# Altium PCB USB_soundcard PCB.pcbdoc (part 1 of 2)
Units mil, origin at the board's own origin, x right, y up, seen from the top; angles counter-clockwise.
Board outline 41897 x 30671 mil, 2 copper layers (Top Layer, Bottom Layer); 93 components, 106 nets, 313 pads, 255 vias.
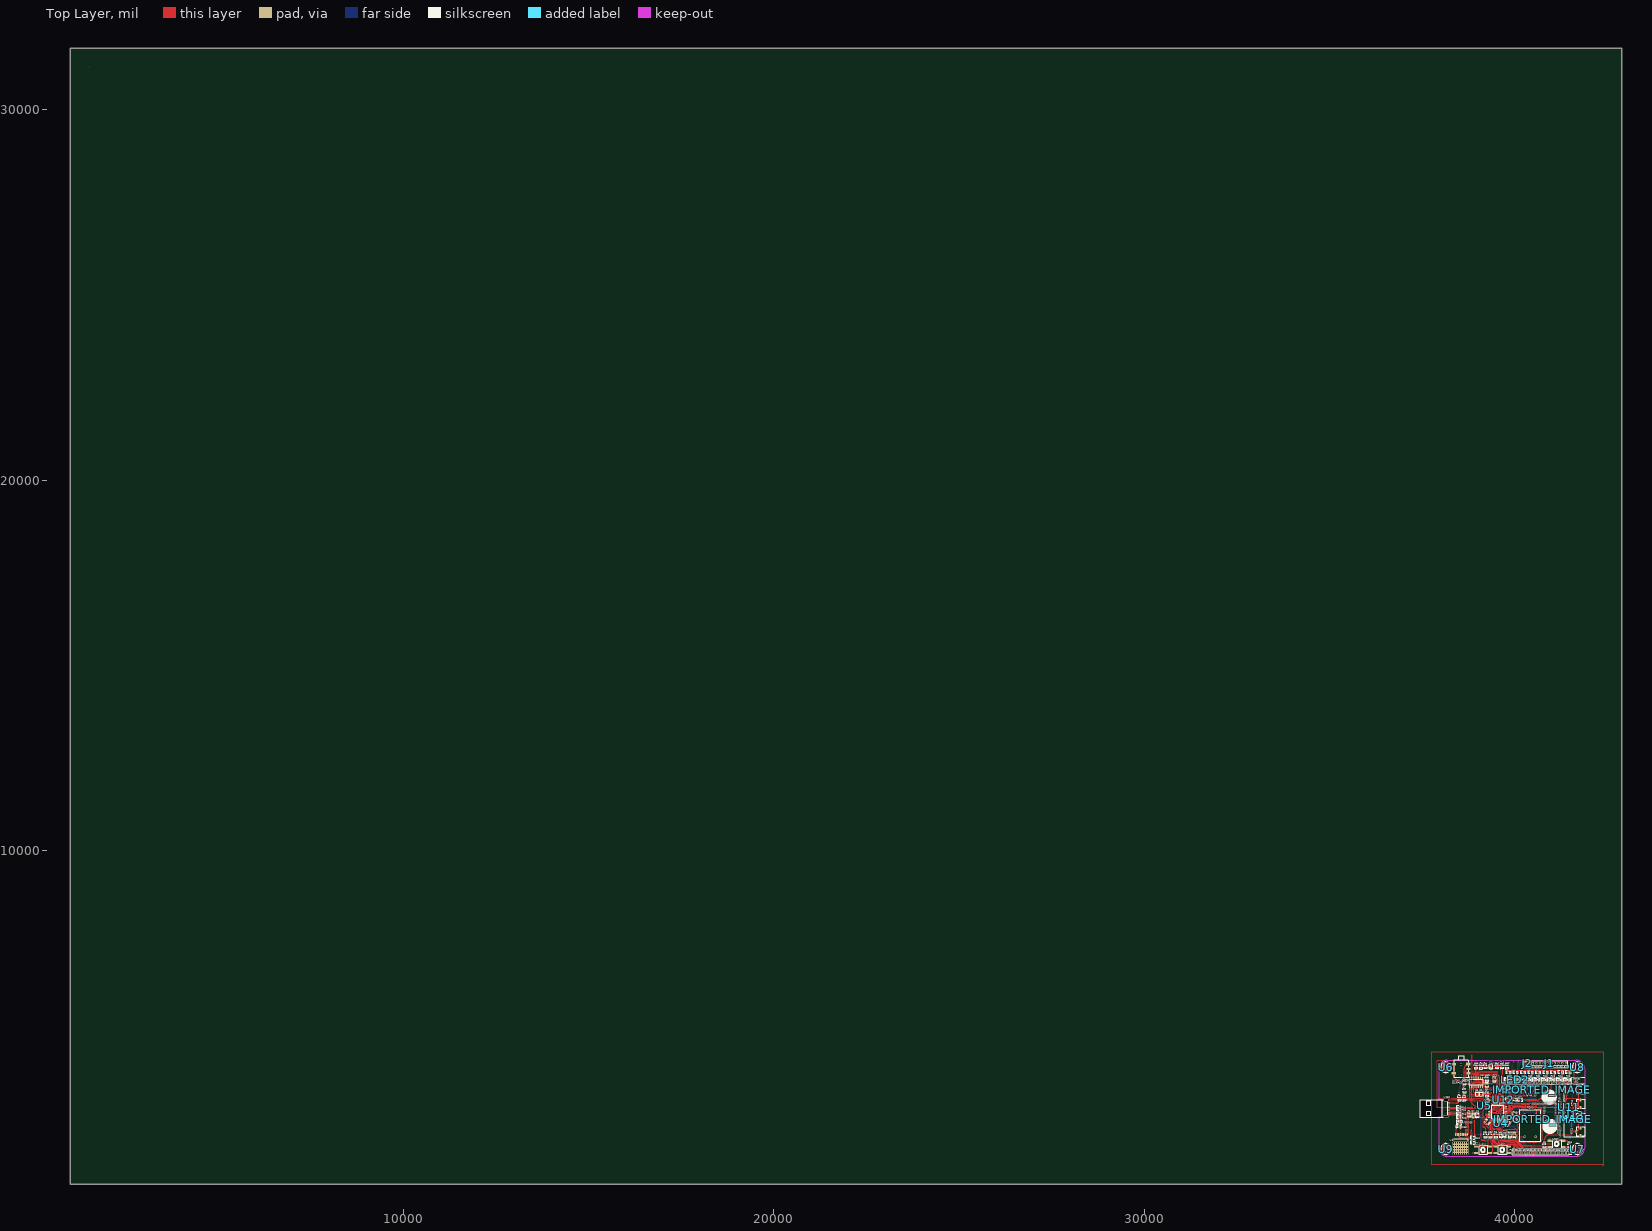
[diagram p0: Top Layer view]
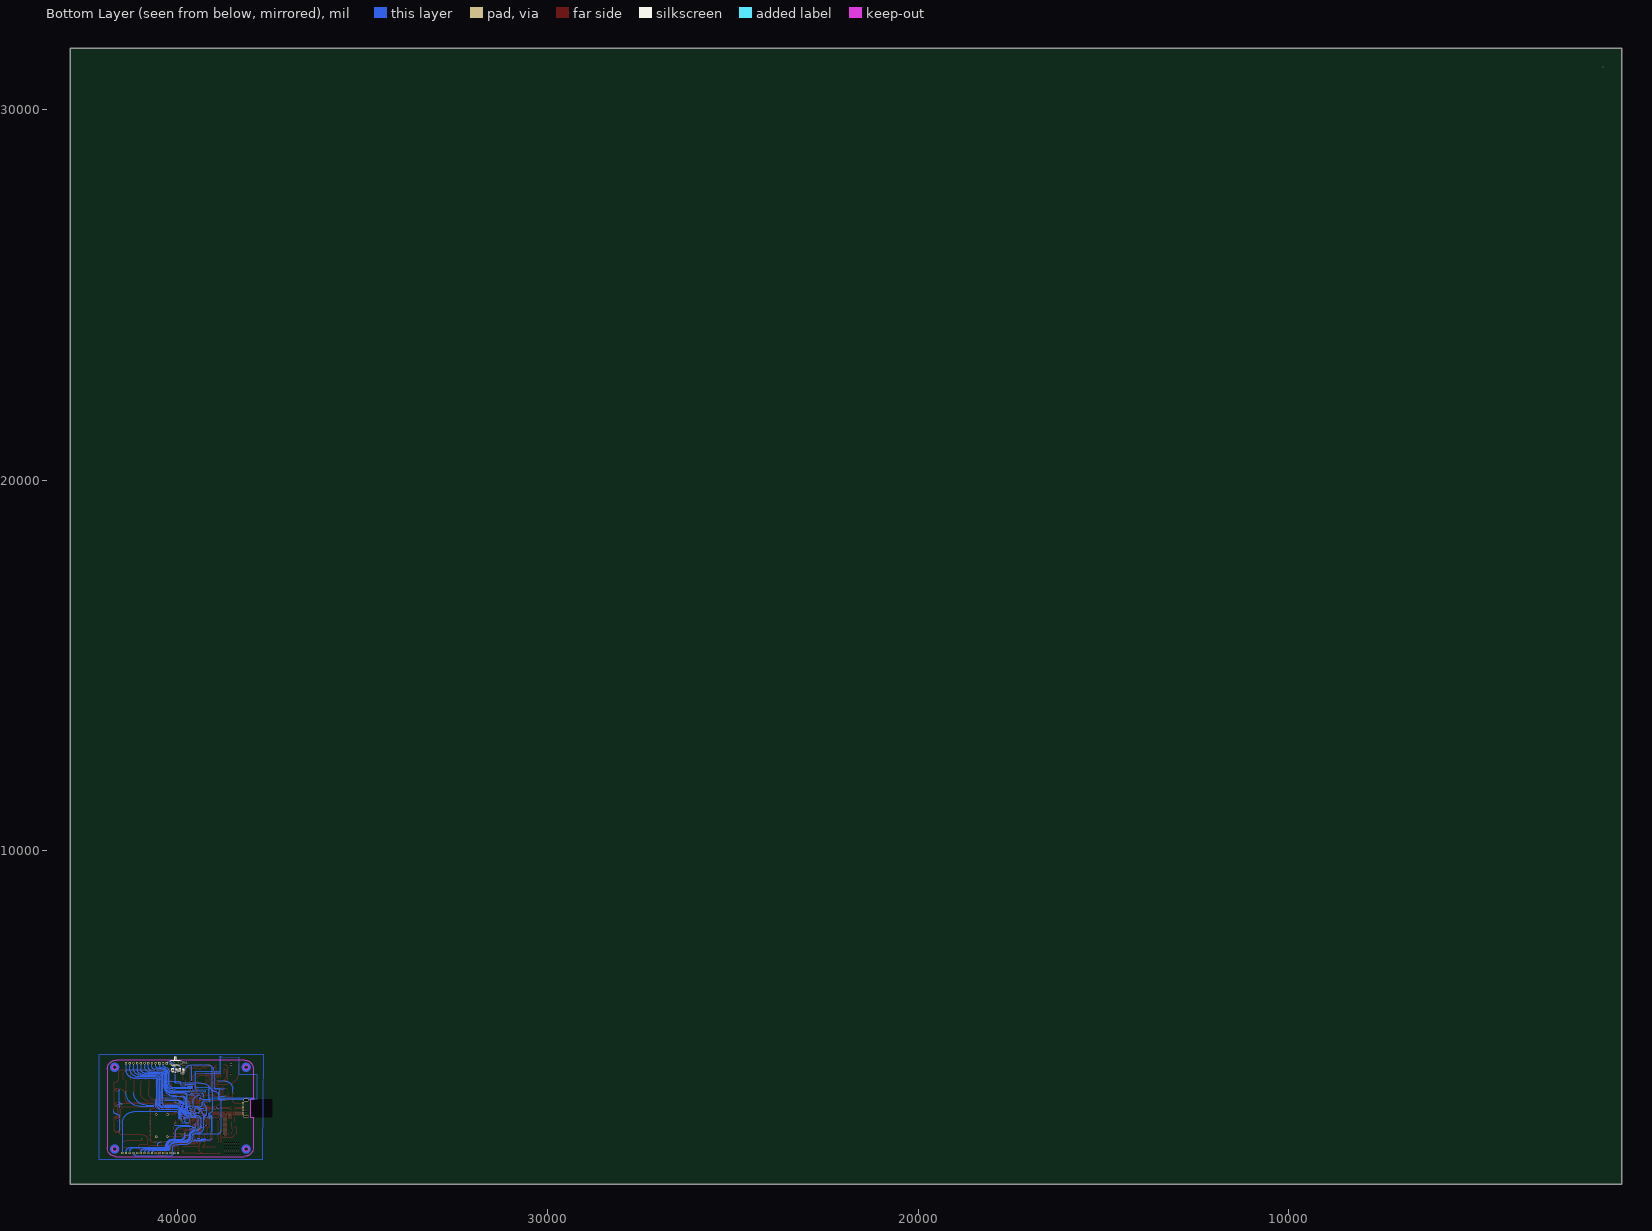
[diagram p1: Bottom Layer view, seen from below]

## Layer stack, top to bottom
Top Layer: signal copper (thickness not stored)
Dielectric: dielectric 12.6, FR-4, Dk 4.8
Bottom Layer: signal copper (thickness not stored)

## Board outline
42897,1000 1000,1000 1000,31671 42897,31671

## Components (designator, comment, footprint, x,y, rotation, side; value= is the part's Value field where it differs from the comment)
AUDIO_OUTPUT "PJ-365-A" AUDIO-SMD_PJ-365-A 38552.91,4116.03 r0 top
C1 "2.2uF" C0805 39247,3426.05 r90 top
C2 "100nF" C0805 38639.93,3312 r270 top
C3 "10uF" CAP-SMD_L3.2-W1.6 38981.93,3435 r270 top
C4 "4.7nF" C0805 39245.93,3672 r270 top
C6 "10uF" CAP-SMD_L3.2-W1.6 39092.93,3435 r270 top
C7 "10uF" CAP-SMD_L3.2-W1.6 38881,2862.05 r270 top
C8 "4.7nF" C0805 38639.93,3741 r270 top
C9 "2.2uF" C0805 38995,2865.05 r270 top
C10 "1uF" C0805 39245.93,3840 r270 top
C11 "100nF" C0805 38867.93,2112 r0 top
C12 "1uF" C0805 39452.93,3837 r90 top
C14 "10uF" CAP-SMD_L3.2-W1.6 39362.93,4173 r90 top
C15 "4.7uF" C0805 38954.93,4176 r270 top
C16 "100nF" C0805 41476,2037.05 r270 top
C17 "100nF" C0805 39512.93,4179 r270 top
C18 "100nF" C0805 39656.93,4179 r270 top
C19 "100nF" C0805 39788.93,4176 r270 top
C22 "10uF" CAP-SMD_L3.2-W1.6 39733,2319.05 r90 top
C23 "100nF" C0805 40156,3282.05 r180 top
C24 "1uF" C0805 39988,2322.05 r270 top
C25 "1nF" C0805 39871,2322.05 r90 top
C26 "100nF" C0805 39802,3276.05 r135 top
C27 "100nF" C0805 39259,3231.05 r45 top
C28 "100nF" C0805 39262,2676.05 r135 top
C29 "100nF" C0805 39814,2640.05 r225 top
C30 "10pF" C0805 39997.99,2731 r0 top
C31 "100nF" C0805 39208,2319.05 r90 top
C32 "100nF" C0805 39346,2319.05 r90 top
C33 "10nF" C0805 38497,2562.05 r180 top
C34 "2.2uF" C0805 38867.93,2256 r0 top
FPC1 "XW05200-04" FPC-SMD_4P-P0.50_XW05200-04 41722,3552 r90 top
FPC2 "XW05200-04" FPC-SMD_4P-P0.50_XW05200-04 41722,3168 r90 top
FPC3 "XW05200-04" FPC-SMD_4P-P0.50_XW05200-04 41722,2787 r90 top
FPC4 "XW05200-04" FPC-SMD_4P-P0.50_XW05200-04 41722,2418 r90 top
IMPORTED_IMAGE "IMPORTED_IMAGE" IMPORTED_IMAGE 40755.25,2758.62 r0 top
IMPORTED_IMAGE "IMPORTED_IMAGE" IMPORTED_IMAGE 40730.26,3544.87 r0 top
J1 "HDR-M-2.54_1x10" HDR-M-2.54_1X10 40936,4266 r0 top
J2 "HDR-M-2.54_1x2" HDR-M-2.54_1X2 40336,4266 r0 top
KEY1 "TS-1102S-C-E-B" KEY-SMD_4P-L6.0-W6.0-P4.50-LS8.6 39143.9,1926 r0 top
KEY2 "TS-1102S-C-E-B" KEY-SMD_4P-L6.0-W6.0-P4.50-LS8.6 39662.9,1926 r0 top
L1 "FCM1608KF-601T03" L0603 40000,3282.05 r0 top
L2 "FCM1608KF-601T03" L0603 39613,2316.05 r270 top
LED1 "Red" LED0805-R-RD 39814,3816.05 r0 top
LED2 "Red" LED0805-R-RD 40012,3816.05 r0 top
LED3 "Red" LED0805-R-RD 40210,3816.05 r0 top
LED4 "Green" LED0805-FD 40414,3816.05 r180 top
LED5 "Green" LED0805-FD 40615,3816.05 r180 top
LED6 "Green" LED0805-FD 40819,3816.05 r180 top
LED7 "Blue" LED0805-R-RD 41023.05,3816.05 r0 top
LED8 "Blue" LED0805-R-RD 41227,3816.05 r0 top
LED9 "Blue" LED0805-R-RD 41431,3813.05 r0 top
NRST "TS-1102S-C-E-B" KEY-SMD_4P-L6.0-W6.0-P4.50-LS8.6 41132.9,2085 r0 top
P1 "Header-Female-2.54_1x16" HDR-16X1/2.54 40733.93,1839 r270 top
POWER "Green" LED0805-FD 38500,2688.05 r0 top
R1 "0" R0805#1 38764,2868.05 r270 top
R2 "130K" R0805#1 38639.93,3522 r90 top
R3 "100K" R0805#1 39487,2319.05 r90 top
R4 "0" R0805#1 39206.93,4179 r270 top
R5 "0" R0805#1 38504.93,3312 r270 top
R6 "100K" R0805#1 39083.93,4176 r90 top
R7 "10K" R0805#1 40798,2037.05 r270 top
R10 "10K" R0805#2 39882.63,4077 r180 bottom
R11 "10K" R0805#2 40075.37,4077 r180 bottom
R12 "10" R0805#1 39997.99,2881 r180 top
R14 "0" R0603 38500,2910.05 r180 top
R15 "0" R0603 38498.93,3015 r180 top
R16 "0" R0603 38498.93,3081 r180 top
R17 "620" R0805#1 39824.93,4014 r0 top
R18 "620" R0805#1 40019.93,4014 r0 top
R19 "620" R0805#1 40220.93,4014 r0 top
R20 "620" R0805#1 40423,4014.05 r0 top
R21 "620" R0805#1 40624,4014.05 r0 top
R22 "620" R0805#1 40828,4014.05 r0 top
R23 "330" R0805#1 41032,4014.05 r0 top
R24 "330" R0805#1 41236,4017.05 r0 top
R25 "330" R0805#1 41440,4017.05 r0 top
R26 "1K" R0805#1 38497,2805.05 r0 top
SW1 "K3-1296S-J1" SW-SMD_K3-1296S-J1 40042,4287 r0 bottom
TCXO "有源温补晶振24.576MHz" TCXO 40568,2281 r90 top
U1 "STM32F446RET6" LQFP-64_L10.0-W10.0-P0.50-LS12.0-BL 39536.93,2949 r90 top
U2 "TPS78633KTTR" TO-263-5_L10.2-W9.9-P1.70-LS14.4-TL 38537.93,2157 r270 top
U3 "ES9023" SOP-16_150MIL 38783.93,3660 r90 top
U4 "test" TEST 39625,2646 r0 top
U5 "test" TEST 39175,3120 r0 top
U6 "M3" M3-3 38141.93,4155 r0 top
U7 "M3" M3-3 41691.93,1947 r0 top
U8 "M3" M3-3 41691.93,4155 r0 top
U9 "M3" M3-3 38141.93,1947 r0 top
U11 "test" TEST 41464,3075 r0 top
U12 "test" TEST 39685,3273 r0 top
U13 "test" TEST 41581,2862 r0 top
USB1 "USB-05" USB-A-TH_48037-0001 38186.15,3048 r270 top

## Footprints (in the part's own frame and the unit in brackets; to place one, negate y for a bottom-side part, rotate by r counter-clockwise, add the part's x,y. Pads: shape width x height; smd on the part's side, far side on the other; paste and mask are expansions set on the pad)
AUDIO-SMD_PJ-365-A [mm]
  rect 3x2 smd: 1(5,3.1) 2(-5,-3.1)
  rect 3x1.5 smd: 3(5.08,-3.1) 4(-5.08,3.1) 5(5.08,-0.1)
  round 1.6 hole 1.6 unplated: ""(0,-3.1) ""(0,2.9)
  silkscreen extent -4.95,-6.15 4.95,8.9
C0805 [mm]
  rect 1x1.55 smd: 1(-1,0) 2(1,0)
  silkscreen extent -1.75,-1.04 1.75,1.04
CAP-SMD_L3.2-W1.6 [mm]
  rect 1.2x1.4 smd: 1(-1.6,0) 2(1.6,0)
  silkscreen extent -1.6,-1.14 1.6,1.14
FPC-SMD_4P-P0.50_XW05200-04 [mm]
  rect 0.35x1.5 smd: 1(0.75,1.3) 2(0.25,1.3) 3(-0.25,1.3) 4(-0.75,1.3)
  rect 2x1.5 smd: 5(-2.5,-1.3) 6(2.5,-1.3)
  silkscreen extent -3.2,-4.2 3.2,1.3
HDR-16X1/2.54 [mil]
  rect 62x62 hole 35: 1(0,750)
  round 62 hole 35: 2(0,650) 3(0,550) 4(0,450) 5(0,350) 6(0,250) 7(0,150) 8(0,50) 9(0,-50) 10(0,-150) 11(0,-250) 12(0,-350) 13(0,-450) 14(0,-550) 15(0,-650) 16(0,-750)
  silkscreen extent -50,-800 50,800
HDR-M-2.54_1X2 [mm]
  rect 1.7x1.575 hole 1.1: 1(-1.27,0)
  round 1.7 hole 1.1: 2(1.27,0)
  silkscreen extent -2.54,-1.27 2.54,1.27
HDR-M-2.54_1X10 [mil]
  rect 62x62 hole 35: 1(-450,0)
  round 62 hole 35: 2(-350,0) 3(-250,0) 4(-150,0) 5(-50,0) 6(50,0) 7(150,0) 8(250,0) 9(350,0) 10(450,0)
  silkscreen extent -500,-50 500,50
IMPORTED_IMAGE [mil]
  silkscreen extent 0,-400 400,0
KEY-SMD_4P-L6.0-W6.0-P4.50-LS8.6 [mm]
  rect 2.8x1.5 smd: 1(-4.7,2.25) 2(4.7,2.25) 3(-4.7,-2.25) 4(4.7,-2.25)
  silkscreen extent -3,-3 3,3
L0603 [mm]
  rect 1x1.1 smd: 1(-0.9,0) 2(0.9,0)
  silkscreen extent -1.68,-0.85 1.68,0.85
LED0805-FD [mil]
  rect 51.2x55.1 smd: 1(-41.35,0) 2(41.35,0)
  silkscreen extent -78,-40 88,41
LED0805-R-RD [mil]
  rect 51.2x55.1 smd: 1(41.35,0) 2(-41.35,0)
  silkscreen extent -88,-41 78,40
LQFP-64_L10.0-W10.0-P0.50-LS12.0-BL [mm]
  oval 0.28x1.8 smd: 1(-3.75,-5.55) 2(-3.25,-5.55) 3(-2.75,-5.55) 4(-2.25,-5.55) 5(-1.75,-5.55) 6(-1.25,-5.55) 7(-0.75,-5.55) 8(-0.25,-5.55) 9(0.25,-5.55) 10(0.75,-5.55) 11(1.25,-5.55) 12(1.75,-5.55) 13(2.25,-5.55) 14(2.75,-5.55) 15(3.25,-5.55) 16(3.75,-5.55) 33(3.75,5.55) 34(3.25,5.55) 35(2.75,5.55) 36(2.25,5.55) 37(1.75,5.55) 38(1.25,5.55) 39(0.75,5.55) 40(0.25,5.55) 41(-0.25,5.55) 42(-0.75,5.55) 43(-1.25,5.55) 44(-1.75,5.55) 45(-2.25,5.55) 46(-2.75,5.55) 47(-3.25,5.55) 48(-3.75,5.55)
  oval 1.8x0.28 smd: 17(5.55,-3.75) 18(5.55,-3.25) 19(5.55,-2.75) 20(5.55,-2.25) 21(5.55,-1.75) 22(5.55,-1.25) 23(5.55,-0.75) 24(5.55,-0.25) 25(5.55,0.25) 26(5.55,0.75) 27(5.55,1.25) 28(5.55,1.75) 29(5.55,2.25) 30(5.55,2.75) 31(5.55,3.25) 32(5.55,3.75) 49(-5.55,3.75) 50(-5.55,3.25) 51(-5.55,2.75) 52(-5.55,2.25) 53(-5.55,1.75) 54(-5.55,1.25) 55(-5.55,0.75) 56(-5.55,0.25) 57(-5.55,-0.25) 58(-5.55,-0.75) 59(-5.55,-1.25) 60(-5.55,-1.75) 61(-5.55,-2.25) 62(-5.55,-2.75) 63(-5.55,-3.25) 64(-5.55,-3.75)
  silkscreen extent -4.55,-6.05 4.25,4.25
M3-3 [mil]
  Top Layer circle w59.05: c0.01,0 r94.49
  Bottom Layer circle w59.05: c0.01,0 r94.49
  Keep-Out Layer circle w7.87: c0.01,0 r62.99
  silkscreen extent -165,-165 165,165
R0603 [mm]
  rect 1x1.1 smd: 1(-0.8,0) 2(0.8,0)
  silkscreen extent -1.55,-0.8 1.55,0.81
R0805#1 [mm]
  rect 1x1.55 smd: 1(-1,0) 2(1,0)
  silkscreen extent -1.75,-1.02 1.75,1.02
R0805#2 [mm]
  rect 1x1.55 smd: 1(1,0) 2(-1,0)
  silkscreen extent -1.75,-1.02 1.75,1.02
SOP-16_150MIL [mil]
  oval 86.61x23.62 smd: 1(-29,5) 2(-29,-45) 3(-29,-95) 4(-29,-145) 5(-29,-195) 6(-29,-245) 7(-29,-295) 8(-29,-345) 9(209,-345) 10(209,-295) 11(209,-245) 12(209,-195) 13(209,-145) 14(209,-95) 15(209,-45) 16(209,5)
  silkscreen extent 20,-362 159,22
SW-SMD_K3-1296S-J1 [mm]
  rect 0.9x1.25 smd: 1(2.25,2.075) 2(0.75,2.075) 3(-2.25,2.075)
  rect 0.8x0.9 smd: 4(-3.8,1.1) 5(-3.8,-1.1) 6(3.8,-1.1) 7(3.8,1.1)
  round 1 hole 1 unplated: ""(-1.5,0) ""(1.5,0)
  silkscreen extent -3.17,-3.9 3.17,1.52
TCXO [mil]
  round 60 hole 36: 1(0,0) 2(600,0) 3(600,300) 4(0,300)
  silkscreen extent -133,-126 733,426
TEST [mm]
  round 1 smd: 1(0,0)
TO-263-5_L10.2-W9.9-P1.70-LS14.4-TL [mil]
  rect 90x42.1 smd: 1(-183.77,134) 2(-183.77,67) 3(-183.77,0) 4(-183.77,-67) 5(-183.77,-134)
  rect 350x419.68 smd: 6(183.77,0)
  silkscreen extent -188,-200 -11,200
USB-A-TH_48037-0001 [mm]
  round 1.6 hole 1: 1(3.5,1.05) 2(1,1.05) 3(-1,1.05) 4(-3.5,1.05)
  oval 2x3.5 hole 1.2 slot 2.7 at 90 deg: 5(-5.7,-1.05) 6(5.7,-1.05)
  round 1.2 hole 1.2 unplated: ""(-2.25,-1.05) ""(2.25,-1.05)
  Multi-Layer board cut-out: -6.096,-4.03 6.096,-4.03 6.096,-19.016 -6.096,-19.016
  silkscreen extent -6,-18.85 6,-0.05

## Via types
v1: diameter 24, hole 12, Top Layer to Bottom Layer, tented both sides, 255 vias

## Nets (pads, with @x,y where several pads share a name; then routed paths per layer and width w, separated by ;. In a path a pad name is that pad's centre, name@x,y a point inside that pad or via, vN(x,y) a via of type N, cw(c..) or ccw(c..) an arc to the next point about the centre after c; other vN are vias at no path point)
5V_USB: R1.1 R14.1 R26.2 | length 341.8
  Top Layer w20: R26.2@38536.37,2805.05 38536.37,2905.18 ccw(c38531.5,2905.18) R14.1@38531.49,2910.05 38761.37,2910.05 cw(c38761.37,2907.41) R1.1@38764,2907.42
  other v1: 38578,2865 38614,2865 38698,2889 38698,2931
+3V3: C2.2 C3.1 C11.1 C34.1 FPC1.3 FPC2.3 FPC3.3 FPC4.3 L2.1 P1.10 P1.14 R4.1 R6.2 R7.1 R11.1 R17.1 R18.1 R19.1 R20.1 R21.1 R22.1 R23.1 R24.1 R25.1 U2.4 U3.4 U3.5 | length 12342.1
  Top Layer w6: v1(41569,2409) 41669.98,2409 cw(c41669.98,2408.16) FPC4.3@41670.82,2408.15 ; v1(41569,2778) ccw(c41569.84,2778) 41569.84,2777.16 FPC3.3@41670.82,2777.15
  Top Layer w10: FPC2.3@41670.82,3158.15 ccw(c41671.12,3158.16) 41671.12,3157.86 41722,3157.86 ; FPC1.3@41670.82,3542.15 cw(c41671.66,3542.16) 41671.66,3543 41722,3543
  Top Layer w15: C2.2@38642.93,3269.63 ccw(c38639.93,3269.63) C2.2@38639.93,3272.63 v1@38705.53,3272.63 ; v1(38824,2460) 38824,2262.7 38822.93,2261.63 ccw(c38828.57,2261.63) C34.1@38828.57,2256 ; v1@38920,3498.1 C3.1@38981.93,3498 ; U3.4@38928.93,3631 U3.5@38978.93,3631 38978.93,3501 ccw(c38981.93,3501) C3.1@38981.93,3498 ; R6.2@39083.93,4215.37 R4.1@39203.94,4215.38 ; v1(39544,2349.05) L2.1@39610.6,2349 ; v1(39544,2349.05) 39544,2290.46 39544,2217.05 39544,2163.05 ccw(c39574.05,2163.05) 39574.05,2133 39628,2133 39694,2133 ; 39694,2133.05 39898,2133.05 39976,2133.05 40183.93,1925.12 P1.14@40183.93,1839 ; R17.1@39785.57,4014 cw(c39785.57,4021.57) 39778,4021.57 v1(39778,4077.05) ccw(c39779.57,4077.05) 39779.57,4075.48 v1(39980.57,4075.48) ; v1@39979,4075.48 ccw(c39980.43,4075.48) v1@39980.43,4074.05 ; R18.1@39980.57,4014 v1(39980.57,4075.48) ; v1@39982,4077.05 40181.57,4077.05 ; 40180,4074.05 cw(c40180,4072.48) 40181.57,4072.48 ; 40180,4077 R19.1@40181.57,4014 ; 40180,4077.05 40380.27,4077.05 cw(c40380.27,4073.68) v1(40383.64,4073.68) ; P1.14@40183.93,1839 P1.14@40183.93,1847.12 ; R20.1@40383.63,4014.05 v1(40383.64,4073.68) ; v1@40384,4074.05 ccw(c40384,4073.68) v1(40383.64,4073.68) ; P1.10@40583.93,1839 40661.9,1917 41008,1917 41047,1956 41047,2037 41007.6,2076.4 R7.1@40798,2076.42 cw(c40800.63,2076.42) R7.1@40800.63,2079.05 ; R21.1@40584.63,4014.05 v1(40584.64,4073.68) ; v1@40585,4074.05 ccw(c40585,4073.68) v1(40584.64,4073.68) ; R22.1@40788.6,4011.1 v1(40789,4074.05) ; v1@40788.64,4070.68 cw(c40789,4070.68) v1@40789,4071.05 ; R7.1@40800.6,2079 40801,2193 cw(c40942,2193) 40942,2334 41503,2334 ccw(c41503,2400) 41569,2400 v1(41569,2409) ; 40992.6,4073.7 41497,4074 41518,4074 cw(c41518,3996) 41596,3996 41596,3825 ccw(c41668,3825) 41668,3753 ; R23.1@40992.63,4014.05 40992.64,4073.68 ; 40993,4074.05 ccw(c40993,4073.68) 40992.64,4073.68 ; 41195.97,4073.82 41195.97,4017.7 ccw(c41196.63,4017.7) R24.1@41196.63,4017.05 ; R25.1@41398.45,4019.23 ccw(c41400.63,4019.23) R25.1@41400.63,4017.05 41400.64,4073.94 ; 41671,3753 41668,3753 ; v1(41722,3003) 41722,3042 41722,3159.2 41722,3543 41722,3699 ccw(c41668,3699) 41668,3753 ; v1(39980.57,4075.48) ccw(c39979,4075.48) 39979,4077.05 cw(c39979,4075.48) v1(39980.57,4075.48) ; v1(40383.64,4073.68) v1(40584.64,4073.68) ; v1(40584.64,4073.68) 40788.64,4073.68 ccw(c40788.64,4074.05) v1(40789,4074.05) 40992.27,4074.05 cw(c40992.27,4073.68) 40992.64,4073.68
  Top Layer w20: U2.4@38470.93,2340.77 ccw(c38555.71,2340.77) 38555.71,2256 C34.1@38828.57,2256 C11.1@38828.57,2112 ; v1@38705.53,3272.63 ccw(c38705.53,3273) v1(38705.94,3273) ; R4.1@39203.94,4215.38 ccw(c39203.94,4218.37) R4.1@39206.93,4218.37 ; L2.1@39610.58,2349.05 ccw(c39610.58,2351.48) L2.1@39613,2351.48
  Bottom Layer w6: P1.10@40583.93,1839 P1.10@40583.93,1858.12
  Bottom Layer w15: v1(38705.94,3273) 38831.94,3271.99 ccw(c38831.94,3342.05) 38902,3342.05 38902,3468.46 cw(c38931.59,3468.46) v1@38931.59,3498.05 ; 38853.97,3275.54 ccw(c38853.97,3244.52) 38822.94,3244.52 38822.94,2454 ccw(c38930.48,2454) 38930.48,2346.46 ; v1(38920,3498.05) 38980,3498.05 ccw(c38980,3582.05) 39064,3582.05 39064,4134.05 cw(c39145,4134.05) v1(39145,4215.05) 39640,4215.05 cw(c39640,4077.05) v1(39778,4077.05) ; 38930.5,2346.5 v1@39541.4,2346.5 ; v1(39980.57,4075.48) cw(c39982.09,4075.48) 39982.09,4077 R11.1@40036,4077 ; v1(41569,2409) v1(41569,2778) 41569,2838 cw(c41623,2838) 41623,2892 41634.37,2892 ccw(c41634.37,2979.63) 41722,2979.63 v1(41722,3003)
AGND: AUDIO_OUTPUT.1 C2.1 C3.2 C4.1 C6.2 C8.1 C12.1 R2.1 R5.1 U3.12 | length 2869.9
  Top Layer w15: R5.1@38504.57,3345 ccw(c38504.57,3345.37) 38504.94,3345.37 cw(c38510.93,3345.37) R5.1@38510.93,3351.37 ; v1(38504.94,3462) R5.1@38504.93,3351.37 C2.1@38639.93,3351.37 ; C8.1@38639.57,3780 ccw(c38639.57,3780.37) C8.1@38639.93,3780.37 ; R2.1@38639.93,3482.63 C2.1@38639.93,3351.37 cw(c38663.57,3351.37) 38663.57,3375 v1(38705.94,3375) ; v1@38713,3780.05 ccw(c38712.68,3780.05) v1(38712.68,3780.37) C8.1@38639.93,3780.37 ; AUDIO_OUTPUT.1@38749.78,4238.05 ccw(c38749.78,4128.57) 38640.31,4128.57 38640.31,3780 cw(c38640.31,3780.37) C8.1@38639.93,3780.37 ; v1(38866,3375.05) C3.2@38978.9,3375 ; v1(38909.94,3780) ccw(c38909.93,3849) U3.12@38978.93,3849 ; U3.12@38978.9,3828.4 U3.12@38978.93,3869 ; C3.2@38978.93,3375 cw(c38978.93,3372) C3.2@38981.93,3372 C6.2@39092.93,3372 ; U3.12@38978.93,3869 ccw(c39100.93,3869) 39100.93,3747 39161.93,3747 39176.93,3747 39191.93,3747 39206.93,3747 39221.93,3747 cw(c39221.93,3722.99) 39245.94,3722.99 C4.1@39245.93,3711.37 ; C4.1@39234.31,3723 cw(c39234.31,3711.37) C4.1@39245.93,3711.37 ; C12.1@39452.93,3797.63 cw(c39366.68,3797.63) 39366.68,3711.37 C4.1@39245.93,3711.37
  Bottom Layer w15: v1(38504.94,3462) 38504.94,3572.63 cw(c38712.68,3572.63) v1(38712.68,3780.37) 38909.57,3780.37 cw(c38909.57,3780) v1(38909.94,3780) ; v1(38705.94,3375) 38726.9,3375 v1(38866,3375.05)
AUDIO_OUTPUT_2: AUDIO_OUTPUT.2 AUDIO_OUTPUT.4 C8.2 U3.7 | length 1179.6
  Top Layer w6: AUDIO_OUTPUT.4@38352.93,4238.05 38352.93,3997.11 ccw(c38356.07,3997.11) 38356.07,3993.95 38356.07,3985.49 ccw(c38639.94,3985.49) C8.2@38639.93,3701.63 39008.31,3701.63 cw(c39008.31,3631) U3.7@39078.93,3631
AUDIO_OUTPUT_3: AUDIO_OUTPUT.3 AUDIO_OUTPUT.5 C4.2 U3.8 | length 1077.5
  Top Layer w6: AUDIO_OUTPUT.3@38752.91,3993.99 AUDIO_OUTPUT.5@38752.91,4112.1 38739.02,4112.06 ccw(c38739.02,4050.05) 38677,4050.05 38677,3960.6 ccw(c38899.6,3960.6) 38899.6,3738 ; 38899,3738.05 39021.93,3738 cw(c39021.93,3631) U3.8@39128.93,3631 39244.31,3631 ccw(c39244.31,3632.63) C4.2@39245.93,3632.63
C7_1: C7.1 C9.1 R1.2 U2.1 U2.2 | length 933.4
  Top Layer w20: U2.2@38604.93,2340.77 U2.1@38671.93,2340.77 ; U2.1@38674.17,2343 ccw(c38674.17,2340.77) U2.1@38671.93,2340.77 ; C9.1@38995,2904.42 ccw(c38974.38,2904.42) 38974.38,2925.04 C7.1@38881,2925.05 cw(c38784.63,2925.04) 38784.63,2828.67 R1.2@38764,2828.68 38706.63,2828.67 ccw(c38706.63,2796.05) 38674,2796.05 38674,2342.83 cw(c38671.94,2342.83) U2.1@38671.93,2340.77
  other v1: 38746,2316 38746,2358 38713,2388 38686,2421 38737,2421 38686,2463 38737,2463 38686,2505 38737,2505 38686,2595 38737,2595 38686,2637 38737,2637 38689,2721 38740,2721 38689,2757 38740,2757
CLK_OUT: C30.1 R12.2 U1.5 | length 353.2
  Top Layer w6: U1.5@39755.43,2880.1 R12.2@39958.62,2881 C30.1@39958.62,2731
GND: C1.2 C7.2 C9.2 C11.2 C14.2 C15.1 C16.1 C17.1 C18.1 C19.1 C22.2 C23.1 C24.1 C25.2 C26.1 C27.1 C28.1 C29.1 C30.2 C31.1 C32.1 C33.1 C34.2 FPC1.4 FPC2.4 FPC3.4 FPC4.4 KEY1.3 KEY1.4 KEY2.3 KEY2.4 NRST.1 NRST.2 P1.5 P1.13 POWER.2 R3.1 R5.2 R10.1 TCXO.2 U1.12 U1.18 U1.31 U1.47 U1.63 U2.3 U2.6 U3.14 USB1.4 USB1.5 USB1.6 | length 16000.4
  Top Layer w6: U1.12@39755.43,3017.9 ccw(c39758.34,3017.9) U1.12@39758.34,3015
  Top Layer w10: v1(39215,2821.05) U1.47@39318.43,2821.05 ; v1@39391,3273.1 39403,3246 39409,3213.1 ; U1.31@39408.99,3167.5 39409,3123.05 v1(39424,3108) ; U1.31@39408.99,3170.49 39408.99,3213.06 ; v1@39615.75,3108.05 39649,3108.05 39655,3108.05 ccw(c39655,3117.94) 39664.89,3117.94 39664.89,3123.94 U1.18@39664.89,3167.5 ; v1(39664,2610.05) 39664,2676.05 39664,2729.61 cw(c39664.89,2729.61) U1.63@39664.89,2730.5 cw(c39664.89,2728.39) U1.63@39667,2728.39 ; v1(39694,3021) U1.12@39755.43,3017.9 39823,3015 ccw(c39823,3072) 39880,3072 39880,3105 cw(c39907,3105) 39907,3132 v1(39955,3153) ; C26.1@39829.84,3245.16 C26.1@39829.84,3248.21 ; v1(41614,2739) 41632,2757 cw(c41632.47,2757) 41632.47,2757.47 FPC3.4@41670.82,2757.47 ; v1(41617,2367) 41638.47,2388.47 FPC4.4@41670.82,2388.47 cw(c41670.35,2388.47) FPC4.4@41670.35,2388 ; v1(41623,3522) FPC1.4@41676.35,3522 ; v1(41650,3111) v1@41650,3117.6 ; v1@41650.99,3111.32 cw(c41670.82,3117.65) FPC2.4@41670.82,3138.47
  Top Layer w15: U3.14@38878.93,3869 38878.94,3903.99 cw(c38941,3903.99) 38941,3966.05 38944,3966.05 ccw(c38944,4050.05) v1(39028,4050.05) ; v1(38881,2745.05) 38907.31,2718.74 C34.2@38907.31,2256 ; C15.1@38954.93,4215.37 ccw(c38991.3,4215.36) 38991.3,4179 v1(39027.16,4179) v1(39281.17,4179) 39332.93,4179 ccw(c39332.93,4209.01) 39362.94,4209.01 C14.2@39362.93,4236 ; KEY1.3@38958.86,1837.42 39328.97,1837.42 ccw(c39328.97,1911.45) 39403,1911.45 39403,2034.05 39370,2130.05 v1(39370,2229.05) 39370,2255.67 C32.1@39346,2279.68 ; C9.2@38995,2825.68 38995,2805.05 ccw(c39013,2805.05) 39013,2787.05 ; 39013,2787 v1(39115,2787.05) ; v1(39163,3207.05) C27.1@39227.3,3207 ; v1(39181,2583.05) 39181,2745.05 39181,2787.05 cw(c39215,2787.05) v1(39215,2821.05) ; v1(39208,2229.05) C31.1@39208,2279.68 ; C27.1@39227.32,3207.05 cw(c39227.32,3203.21) C27.1@39231.16,3203.21 ; v1(39247,3468) 39364,3471 ; C1.2@39247.37,3465.05 cw(c39247.37,3465.42) C1.2@39247,3465.42 cw(c39252.63,3465.42) C1.2@39252.63,3471.05 ; v1@39271,2583.1 C28.1@39289.84,2648.21 ; KEY1.4@39328.97,1837.42 KEY2.3@39477.86,1837.42 KEY2.4@39847.97,1837.42 ; 39340.45,4179.96 ccw(c39341.4,4179.96) 39341.4,4179 v1(39439.17,4179) v1(39590.17,4179) 39620.93,4179 ccw(c39620.93,4215.01) 39656.94,4215.01 C18.1@39656.93,4218.37 ccw(c39659.94,4218.37) 39659.94,4215.37 C19.1@39788.93,4215.37 ; 39364,3471.05 cw(c39364,3438.05) 39397,3438.05 v1(39397,3363.05) ; 39481.88,4179 ccw(c39481.88,4210.06) 39512.94,4210.06 C17.1@39512.93,4218.37 ; v1(39490,2229.05) R3.1@39490,2277.05 ; v1(39562,3108.05) v1@39615.75,3108.05 ; v1(39622,3549) v1(39622,3774) ; v1(39718,3243) 39824.63,3243 C26.1@39829.84,3248.21 ; C22.2@39733,2382.05 v1(39733,2322.05) cw(c39733.05,2322) v1(39733,2322.05) v1(39868,2322.05) 39868,2361.42 v1(39929.34,2361.42) C24.1@39988,2361.42 ; C19.1@39788.93,4215.37 v1(39853,4215) ; v1@39841,2856.1 39892,2856 ; C29.1@39841.84,2667.89 ccw(c39842.68,2667.89) 39842.68,2667.05 v1(39937,2667.05) 39922,2667.05 cw(c39922,2682.05) 39907,2682.05 39907,2697.05 v1(39907,2730.05) ; KEY2.4@39847.97,1837.42 ccw(c39847.97,1838.38) KEY2.4@39848.93,1838.38 ; KEY2.4@39848.9,1838.4 v1(39848.94,1899) ; v1(39874,2904) 39904,2904 ; 39892,2856.05 cw(c39892,2843.06) 39904.99,2843.06 39904.99,2833 v1(39907,2730.05) ; 39904,2904.05 ccw(c39904,2913.05) 39913,2913.05 ; 39913,2910.05 39913,2913.05 ; v1@39934.81,2667.89 cw(c39934.81,2662.23) v1@39940.47,2662.23 ; v1(39937,2667.05) 40018.2,2662.2 ; C24.1@40002.63,2367.05 ccw(c40002.63,2364.42) 40000,2364.42 40020.63,2364.42 cw(c40020.63,2343.05) 40042,2343.05 40042,2337.05 ccw(c40060,2337.05) 40060,2319.05 ; 40018.23,2662.23 cw(c40018.23,2579.53) v1(40100.94,2579.53) ; C30.2@40037.36,2731 40037.36,2676.67 ccw(c40058.24,2676.67) v1(40058.24,2655.79) ; 40060,2319 v1(40099,2319.05) v1(40100.94,2579.53) ; v1@40098.62,2319.05 cw(c40098.62,2316.74) v1@40100.93,2316.74 ; v1@40099,2241.1 40100.9,2196 ; 40100.93,2196 ccw(c40163.93,2196) v1(40163.94,2133) ccw(c40165.93,2133) 40165.93,2131 40222.99,2131 v1(40313,2131) cw(c40314.99,2131) 40314.99,2133 v1(40447.2,2133) v1(40601.87,2133) 40659.4,2133 ccw(c40659.4,2207.53) v1(40733.94,2207.53) v1(40733.94,2997) ; v1@40106.9,2984 v1(40108,2985.05) ; C23.1@40195,3297 v1(40279,3297) v1(40582,3297) ; C23.1@40195.37,3282.05 cw(c40198.37,3282.05) C23.1@40198.37,3285.05 ; P1.13@40283.93,1839 40283.93,1822.12 ccw(c40324,1822.12) 40324,1782.05 40450,1782.05 40492,1782.05 ccw(c40492,1824.05) 40534,1824.05 v1(40534,2007) ; TCXO.2@40568,2881 40582,2895 40582,2916 40582,2922 40582,2940 40582,3035.51 cw(c40583.49,3035.51) v1@40583.49,3037 ; v1@40733.93,3000.06 v1(40733.94,2997) ; v1@40951,2229.05 v1(40951,2235.05) 40951,2176.68 cw(c40947.9,2176.68) NRST.1@40947.86,2173.58 41317.97,2173.58 41378.85,2173.58 cw(c41378.85,2076.42) C16.1@41476,2076.42 ; 39913,2913.05 cw(c39925,2913.05) 39925,2925.05 39943,2925.05 40042,2925.05 40048,2925.05 ccw(c40048,2985.05) v1(40108,2985.05) 40108,2995.56 cw(c40149.44,2995.56) v1(40149.44,3037) v1(40248.33,3037) v1(40350.94,3037) v1(40447.33,3037) 40693.94,3037 cw(c40693.93,2997) v1(40733.94,2997)
  Top Layer w20: USB1.4@38227.5,3185.8 38424.09,3185.79 ccw(c38424.09,3266.63) R5.2@38504.93,3266.63 ; C33.1@38535.31,2547 cw(c38535.31,2544.37) C33.1@38537.93,2544.37 ; C33.1@38536.37,2562.05 v1(38537.14,2453.4) U2.3@38537.93,2340.77 ; C33.1@38536.37,2562.05 ccw(c38536.38,2567.02) 38541.35,2567.02 38541.35,2624.08 POWER.2@38541.35,2688.05 ; v1(38864.94,1836) 38957.47,1836 ccw(c38957.47,1837.42) KEY1.3@38958.86,1837.42 ; U3.14@38878.93,3869 U3.14@38878.94,3897.99 ; v1(38881,2745.05) C7.2@38881,2799.05 38968.37,2799.05 ccw(c38968.37,2825.68) C9.2@38995,2825.68 ; C11.2@38907.31,2112 C34.2@38907.31,2256
  Bottom Layer w6: P1.5@41083.93,1827.98 P1.5@41083.93,1839
  Bottom Layer w10: v1(39163,3207.05) 39156.95,3207.05 cw(c39156.95,3240) 39124,3240 39124,3276 cw(c39145,3276) 39145,3297 39274,3297 39330.95,3297 ccw(c39330.95,3363.05) v1(39397,3363.05) ; v1(39424,3108) v1(39562,3108.05) ; v1@39615.75,3108.05 ccw(c39615.8,3108.05) v1(39615.75,3108.05) 39676,3108 cw(c39676,3063) 39721,3063 39721,3051 39718,3039 v1(39694,3021) ; v1(39955,3153) v1(40063,3216)
  Bottom Layer w15: v1(39027.16,4179) 39027.16,4050.89 ccw(c39028,4050.89) v1(39028,4050.05) ; v1(39115,2787.05) v1(39181,2787.05) ; v1(39181,2583.05) v1(39271,2583.05) ; v1(39208,2229.05) v1(39370,2229.05) v1(39490,2229.05) ; v1(39247,3468) 39247,3507 cw(c39262,3507) 39262,3522 39283,3522 39595,3522 ccw(c39595,3549) v1(39622,3549) ; v1@39391,3273.1 v1@39397,3363.1 ; v1(39590.17,4179) cw(c39590.17,4147.17) 39622,4147.17 v1(39622,3774) ; v1@39615.75,3108.05 39643,3108.05 ccw(c39643,3150.05) 39685,3150.05 ; v1(39664,2610.05) ccw(c39694.52,2610.05) 39694.52,2579.53 v1(40100.94,2579.53) ; 39685,3150 39685,3216 ; 39685,3216.05 cw(c39712,3216.05) v1@39712,3243.05 ; R10.1@39843.26,4077 ccw(c39843.26,4080.74) R10.1@39847,4080.74 ; R10.1@39853,4077 v1(39853,4137) ; v1(40447.2,2133) 40474.05,2133 cw(c40474.05,2073.05) 40534,2073.05 v1(40534,2007) ; v1(40582,3039) v1(40582,3297)
  other v1: 38350,1821 38401,1821 38455,1821 38509,1821 38566,1821 38617,1821 38671,1821 38725,1821 38350,1893 38401,1893 38455,1893 38509,1893 38566,1893 38617,1893 38671,1893 38725,1893 38350,1965 38401,1965 38455,1965 38509,1965 38566,1965 38617,1965 38671,1965 38725,1965 38350,2043 38401,2043 38455,2043 38509,2043 38566,2043 38617,2043 38671,2043 38725,2043 38347,2118 38401,2118 38455,2118 38509,2118 38563,2118 38617,2118 38671,2118 38725,2118 38908,2181.05 40099,2241.05 40733.94,2334.2 40733.94,2439.53 40100.94,2443.53 40101.88,2516.87 40733.94,2527.53 40733.94,2616.87 38541.35,2624.08 40733.94,2711.53 40733.94,2802.2 39841,2856.05 40733.94,2904 39391,3273.05
I2S2_CK: U1.34 U3.1 | length 968.8
  Top Layer w6: U1.34@39316.54,3075.05 39076,3075.05 cw(c39076,3373.11) 38777.93,3373.11 38777.93,3414 38777.93,3531 U3.1@38777.93,3630 ; U3.1@38777.93,3630 cw(c38778.93,3630) U3.1@38778.93,3631 ccw(c38778.93,3630) U3.1@38777.93,3630
I2S2_MCK: U1.22 U3.13 | length 1467.9
  Top Layer w6: U3.13@38928.93,3869 cw(c39019.93,3869) 39019.93,3960 39506.93,3960 cw(c39506.93,3880.78) 39586.15,3880.78 39586.15,3167.5 cw(c39586.15,3167.65) U1.22@39586,3167.65
I2S2_SD: U1.11 U3.3 | length 1348.4
  Top Layer w6: U3.3@38873.93,3626 cw(c38878.93,3626) U3.3@38878.93,3631 ; U3.3@38879.93,3630 ccw(c38878.93,3630) U3.3@38878.93,3631 ; 39012.1,3420 v1(39367,3420) ; 39012.15,3420.05 cw(c39012.15,3555.26) 38876.93,3555.26 U3.3@38876.93,3628.99 ; v1(39655,3009) 39679,2997 39706,2997 39706.35,2997 U1.11@39754,2997 ; U1.11@39753.6,3000.05 cw(c39753.6,2998.21) U1.11@39755.43,2998.21 ccw(c39753.65,2998.21) U1.11@39753.65,3000 ; U3.3@38876.94,3628.99 cw(c38878.94,3628.99) U3.3@38878.93,3631 ; U3.3@38876.94,3628.99 cw(c38878.94,3628.99) U3.3@38878.93,3631
  Bottom Layer w6: v1@39358,3420.05 cw(c39358,3192.05) 39586,3192.05 ; 39586,3192 39586,3063 39640,3018 v1(39655,3009) v1@39648,3015
I2S2_WS: U1.56 U3.2 | length 1518.1
  Top Layer w6: v1(39169,3255) 38860,3255 cw(c38860,3285) 38830,3285 38830,3483 U3.2@38830,3629.94 ; U1.56@39526,2709 v1(39529,2928) ; U1.56@39527.1,2730.5 ccw(c39527.1,2732.4) U1.56@39529,2732.4 ; U3.2@38830,3629.94 ccw(c38828.94,3629.94) U3.2@38828.93,3631 cw(c38828.94,3629.94) U3.2@38830,3629.94
  Bottom Layer w6: v1(39169,3255) 39250,3255 cw(c39250,3171) 39334,3171 39334,3153 ccw(c39406,3153) 39406,3081 39445,3081 39463,3081 cw(c39463,3015) 39529,3015 v1(39529,2928)
LED1_1: LED1.1 R17.2 | length 203.1
  Top Layer w6: LED1.1@39855.35,3816.05 39855.35,4005.04 cw(c39864.31,4005.04) R17.2@39864.31,4014
LED2_1: LED2.1 R18.2 | length 201.4
  Top Layer w6: LED2.1@40053.35,3816.05 40053.35,4008.04 cw(c40059.31,4008.04) R18.2@40059.31,4014
LED3_1: LED3.1 R19.2 | length 203.1
  Top Layer w6: LED3.1@40251.35,3816.05 40251.35,4005.04 cw(c40260.31,4005.04) R19.2@40260.31,4014
LED4_1: LED4.1 R20.2 | length 216
  Top Layer w6: LED4.1@40455.35,3816.05 40462.37,3816.05 R20.2@40462.37,4014.05 ccw(c40462.37,4007.03) R20.2@40455.35,4007.03
LED5_1: LED5.1 R21.2 | length 205
  Top Layer w6: LED5.1@40656.35,3816.05 40656.35,4014.05 R21.2@40663.37,4014.05
LED6_1: LED6.1 R22.2 | length 205
  Top Layer w6: LED6.1@40860.35,3816.05 40860.35,4014.05 R22.2@40867.37,4014.05
LED7_1: LED7.1 R23.2 | length 202
  Top Layer w6: LED7.1@41064.4,3816.05 41064.4,4007.08 cw(c41071.37,4007.08) R23.2@41071.37,4014.05
LED8_1: LED8.1 R24.2 | length 206.7
  Top Layer w6: LED8.1@41265.4,3816.05 41265.4,4007.08 cw(c41275.37,4007.08) R24.2@41275.37,4017.05
LED9_1: LED9.1 R25.2 | length 208
  Top Layer w6: LED9.1@41472.35,3813.05 41472.35,4010.03 cw(c41479.37,4010.03) R25.2@41479.37,4017.05
NRST: NRST.3 R7.2 U1.7 | length 2678.7
  Top Layer w6: v1@39412,2526.1 v1@39478,2526.1 ; v1(39694,2865.05) 39694,2892 39721,2919 U1.7@39733,2919 ; U1.7@39733,2919.05 ccw(c39733,2919.47) 39733.42,2919.47 U1.7@39755.43,2919.47 ; v1(40045,2244.05) 40045,2193 40060,2178 ; 40058,2180 40201,2037 40759,2037 R7.2@40798,1997.68 ; R7.2@40797.63,1998.05 cw(c40797.63,1997.68) R7.2@40798,1997.68 ; NRST.3@40947.86,1996.42 40799.25,1996.42 cw(c40799.25,1997.68) R7.2@40798,1997.68
  Bottom Layer w6: 39367,2595 39367,2772 39439,2844 39616,2844 39637,2865 39649,2865 ; 39367,2595.57 39367,2578.71 39367,2571.05 ccw(c39412,2571.05) v1(39412,2526.05) ; v1(39478,2526.05) 39571,2526.05 ccw(c39571,2541.05) 39586,2541.05 39586,2544.05 cw(c39595,2544.05) 39595,2553.05 39910,2553.05 cw(c39910,2421.05) 40042,2421.05 ; 39649,2865.05 v1(39694,2865.05) ; 40042,2421 40042,2244 v1(40045,2244.05)
NRST_4: C16.2 NRST.4 | length 158.8
  Top Layer w6: NRST.4@41317.97,1996.42 cw(c41319.23,1996.42) 41319.23,1997.68 C16.2@41476,1997.68
PA0: C31.2 KEY1.1 KEY1.2 U1.14 | length 2121.3
  Top Layer w6: KEY1.1@38958.86,2014.58 KEY1.2@39328.97,2014.58 ; v1(39259,3012.05) 39172,3012.05 ccw(c39172,2979.05) 39139,2979.05 39139,2568.05 ccw(c39175,2568.05) 39175,2532.05 39181,2532.05 cw(c39181,2505.05) 39208,2505.05 C31.2@39208,2358.42 39219.63,2358.42 cw(c39219.63,2301.05) 39277,2301.05 39277,2066.55 ccw(c39328.97,2066.55) KEY1.2@39328.97,2014.58 ; v1(39484,3054) 39538,3054 v1(39553,3069) 39556,3066 v1(39616,3066) ; v1(39694,3051) 39703.3,3057.3 U1.14@39755.43,3057.27 ; U1.14@39755.17,3057 ccw(c39755.17,3057.27) U1.14@39755.43,3057.27 cw(c39755.22,3057.27) U1.14@39755.22,3057.05
  Bottom Layer w6: v1(39259,3012.05) 39259,3015 39298,3054 39394,3054 v1(39484,3054) ; v1(39616,3066) 39631,3051 v1(39694,3051)
PA1: C32.2 KEY2.1 KEY2.2 U1.15 | length 1913.9
  Top Layer w6: v1(39346,2763) C32.2@39346,2358.42 39366.63,2358.42 cw(c39366.63,2313.05) 39412,2313.05 39412,2080.48 ccw(c39477.9,2080.48) KEY2.1@39477.86,2014.58 KEY2.2@39847.97,2014.58 ; U1.15@39755.4,3076.9 39757.4,3075 v1(39811,3075) ; U1.15@39755.43,3076.95 cw(c39756.54,3076.95) U1.15@39756.54,3078.05 ; v1@39809.9,3076.95 ccw(c39809.9,3078.05) v1@39811,3078.05
  Bottom Layer w6: v1(39346,2763) 39346,2769 39436,2859 39535.8,2859 39589.8,2913 39628,2913 cw(c39628.05,2913) 39628.05,2913.05 39715,2913.05 ; 39715.05,2913.05 ccw(c39715.05,3006) 39808,3006 39808,3072 cw(c39811,3072) v1(39811,3075)
PA2: J1.5 U1.16 | length 2098.6
  Top Layer w6: U1.16@39726.41,3096.64 U1.16@39755.43,3096.64 ; U1.16@39735.41,3096.64 U1.16@39755.43,3096.64 ; v1(39811,3126.05) 39811,3114.05 cw(c39796,3114.05) 39796,3099.05 39757.85,3099.05 ccw(c39757.85,3096.64) U1.16@39755.43,3096.64
  Bottom Layer w6: v1(39811,3126.05) 39811,3147.05 39811,3306.05 cw(c39859,3306.05) 39859,3354.05 39997,3354.05 40048,3354.05 ccw(c40048,3666.05) 40360,3666.05 ; 40360,3663.05 40360,3960 ; 40360,3960.05 cw(c40420,3960.05) 40420,4020.05 40435,4020.05 40573,4020.05 40729,4020.05 ccw(c40729,4176.05) 40885,4176.05 J1.5@40885,4264.99 ; J1.5@40885,4264.99 ccw(c40883.94,4264.99) 40883.94,4266.05 cw(c40883.94,4264.99) J1.5@40885,4264.99
PA4: J1.3 U1.20 | length 2018.7
  Top Layer w6: U1.20@39625.51,3167.5 39625.52,3348.57 39625.52,3465.57 cw(c39637,3465.57) v1(39637,3477.05)
  Bottom Layer w6: v1(39637,3477.05) 40120,3477.05 40153,3477.05 ccw(c40153,3633.05) 40309,3633.05 40309,3648.05 40309,4011.05 cw(c40405,4011.05) 40405,4107.05 40591,4107.05 ; J1.3@40683.94,4266.05 40683.94,4166.05 cw(c40624.94,4166.05) 40624.94,4107.05 40591,4107.05 ; 40591,4107.05 cw(c40590.95,4107.05) 40590.95,4107 ccw(c40590.95,4107.05) 40591,4107.05
PA5: J1.2 U1.21 | length 1902.8
  Top Layer w6: U1.21@39605.83,3167.5 39605.84,3472.89 39605.84,3478.89 cw(c39637,3478.89) v1(39637,3510.05)
  Bottom Layer w6: v1(39637,3510.05) 40111,3510.05 ccw(c40111,3684.05) 40285,3684.05 40285,3999.05 cw(c40411,3999.05) 40411,4125.05 40510,4125 ; 40510,4125.05 ccw(c40510,4198.99) 40583.94,4198.99 J1.2@40583.94,4266.05
PA7: J1.1 U1.23 | length 1890.7
  Top Layer w6: v1(39559,3570) 39559,3504.05 39559,3330 39559,3240 39559,3222 39566.47,3214.53 U1.23@39566.46,3167.5 cw(c39566.47,3168.97) U1.23@39565,3168.97
  Bottom Layer w6: v1(39559,3570) 40036,3570 40036,3570.05 40135,3570.05 40141,3570.05 ccw(c40141,3687.05) 40258,3687.05 40258,3924.05 40258,3993.05 cw(c40408,3993.05) 40408,4143.05 40429,4143.05 ccw(c40429,4194.05) 40480,4194.05 40480,4262.11 cw(c40483.94,4262.11) J1.1@40483.94,4266.05
PA8: J1.4 U1.41 | length 2623.7
  Top Layer w6: U1.41@39318.43,2939.16 39456.2,2939.2 v1(39475,2958)
  Bottom Layer w6: v1@39472,2958 39472,2947.53 39521.54,2898 39530.39,2898 39611.39,2979 39685,2979 39739,3033 39739,3405 ; 39739,3405.05 cw(c39793,3405.05) 39793,3459.05 39808,3459.05 39816.17,3459.05 40108,3459 ; 40108,3459.05 40150.89,3459.05 ccw(c40150.89,3635.16) 40327,3635.16 40327,3717.05 40327,4005.05 cw(c40369,4005.05) 40369,4047.05 40654,4047.05 ccw(c40654,4176.99) 40783.94,4176.99 J1.4@40783.94,4266.05
PA10: J2.1 SW1.2 U1.43 | length 2659.8
  Top Layer w6: v1(39184,2901.05) U1.43@39318.43,2899.79 ccw(c39317.18,2899.79) U1.43@39317.18,2901.05
  Bottom Layer w6: 39059.9,3055.1 39059.9,3006 ccw(c39164.85,3006) 39164.85,2901.05 v1(39184,2901.05) ; 39059.93,3055.11 39059.93,3136.98 39059.93,3419.97 ; 39059.93,3423 39059.93,3430.98 cw(c39358,3430.98) 39358,3729.05 39365.89,3729.05 cw(c39365.89,3729) 39365.93,3729 39371.93,3729 cw(c39371.98,3729) 39371.98,3729.05 39553,3729.05 ; 39553,3729 40030,3729 ccw(c40030,3771) 40072,3771 40072,3894 40072,4204.84 ccw(c40071.53,4204.84) SW1.2@40071.53,4205.31 cw(c40120.22,4205.31) 40120.22,4254 40141,4254 ccw(c40141,4269) 40156,4269 40156,4278 cw(c40168,4278) 40168,4290 40240,4290 40262,4290 J2.1@40286,4266
PA11: P1.11 U1.44 | length 2449.6
  Top Layer w6: v1@39073,2223.1 v1(39073,2409.05) ; v1(39184,2868.05) U1.44@39318.43,2880.1 ; v1(39574,2205.05) 39999.9,2205 40267,1938 40384.93,1938 P1.11@40483.93,1839
  Bottom Layer w6: v1(39073,2223.05) ccw(c39095.15,2223.05) 39095.15,2200.9 39097,2200.9 39112,2200.9 39134.6,2200.9 39556,2202.05 v1(39574,2205.05) ; v1(39073,2409.05) 39073,2829.05 cw(c39112,2829.05) 39112,2868.05 v1(39184,2868.05) ; v1@39570.95,2214.05 cw(c39570.95,2214) v1@39571,2214
PA12: P1.12 U1.45 | length 2348.5
  Top Layer w6: v1(39097,2376.05) 39097,2196.05 ccw(c39118,2196.05) 39118,2175.05 39187,2175.05 39193,2175.05 v1(39250,2175.05) ; v1@39178,2838.1 39199,2844.05 39226,2850 U1.45@39318.43,2860.42 ; U1.45@39316.81,2862.05 cw(c39316.81,2860.42) U1.45@39318.43,2860.42 U1.45@39350.63,2860.42 ; v1(39580,2175.05) 40000,2175 40267,1908 40314.93,1908 P1.12@40383.93,1839
  Bottom Layer w6: v1(39097,2376.05) 39097,2421.05 39091,2427.05 39091,2469.05 39091,2487.05 39091,2535.05 39091,2814.05 cw(c39115,2814.05) 39115,2838.05 v1(39178,2838.05) v1@39172,2838.05 ; v1(39250,2175.05) 39583,2175 v1(39580,2175.05)
PA15: J1.6 U1.50 | length 2898.6
  Top Layer w6: U1.50@39408.99,2730.5 39408.99,2772.04 cw(c39423.95,2772.04) 39423.95,2787 39484,2787 v1(39487,2784)
  Bottom Layer w6: v1(39487,2784) 39742,2787 39748.3,2787 ccw(c39748.3,2942.42) 39903.72,2942.42 39904,3012.05 cw(c39991,3012.05) 39991,3099.05 40000,3099.05 40288,3099.05 ccw(c40288.05,3099.05) 40288.05,3099 40303,3099 ccw(c40303,3192) 40396,3192 40396,3204 ; 40396,3201 40396,3951 40396,3963 cw(c40426.05,3963) 40426.05,3993.05 40432,3993.05 40861,3993.05 ccw(c40861,4116.05) 40984,4116.05 40984,4265.99 ccw(c40983.94,4265.99) J1.6@40983.94,4266.05
PB0: J2.2 U1.26 | length 1837.5
  Top Layer w6: U1.26@39507.4,3167.5 cw(c39507.41,3167.97) 39506.94,3167.97 39506.93,3405 39506.93,3469.45 39506.93,3550.93 cw(c39559,3550.93) v1(39559,3603)
  Bottom Layer w6: v1(39559,3603) 40108,3603 ccw(c40108,3714) 40219,3714 40219,4032 cw(c40354,4032) 40354,4167 40357,4167 ccw(c40357,4196) 40386,4196 J2.2@40386,4266
PB1: LED1.2 U1.27 | length 893.5
  Top Layer w6: U1.27@39487.72,3167.5 ccw(c39487.73,3168.7) 39488.94,3168.7 39488.93,3408 39488.93,3568.93 cw(c39559,3568.93) v1(39559,3639) ; v1(39751,3639.05) ccw(c39751,3654.05) 39766,3654.05 39766,3687.05 39766,3809.4 cw(c39772.65,3809.4) LED1.2@39772.65,3816.05
  Bottom Layer w6: v1(39559,3639) v1(39751,3639.05)